# EAGLE board v2 (EAGLE 7.3.0)
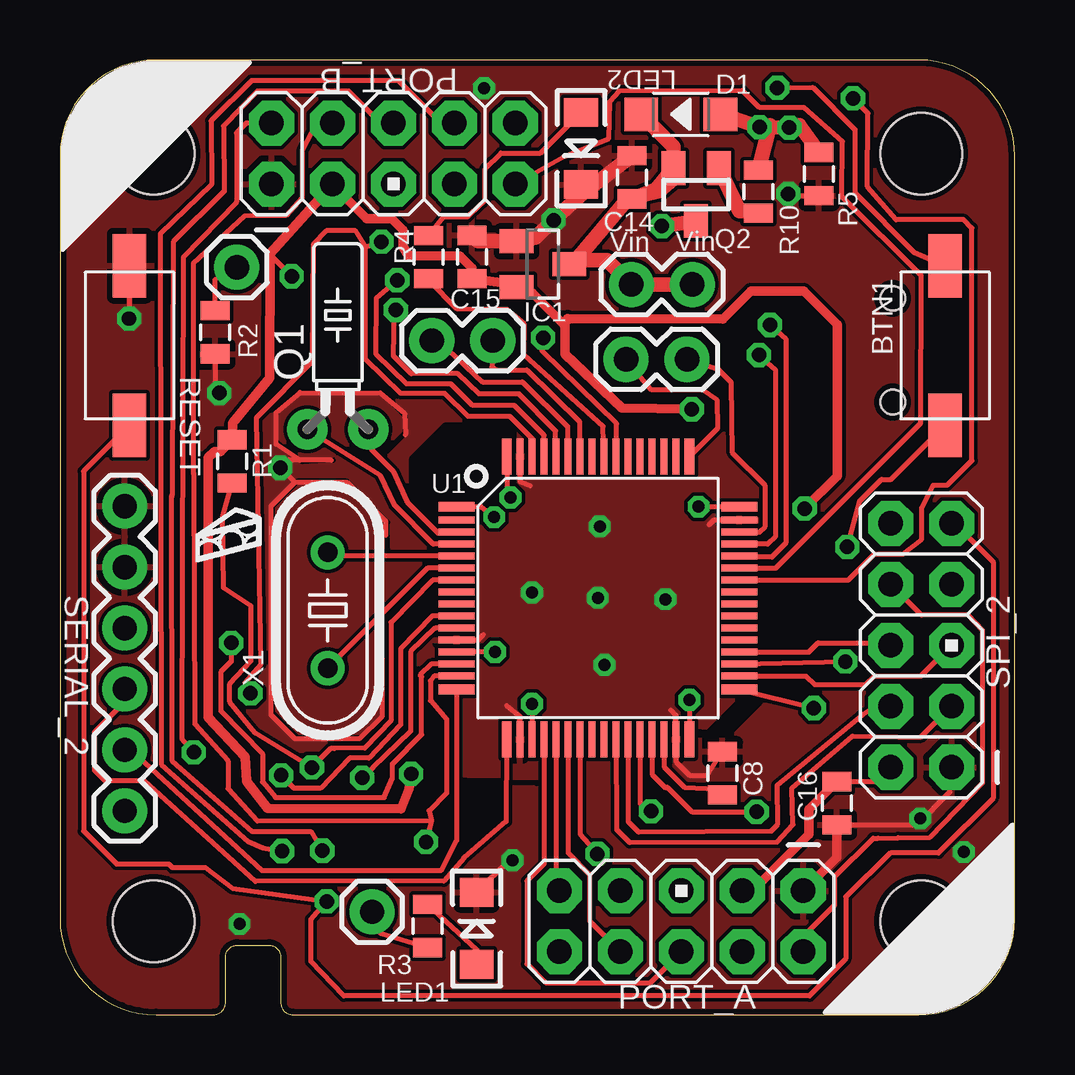
[diagram p0: board, top side]
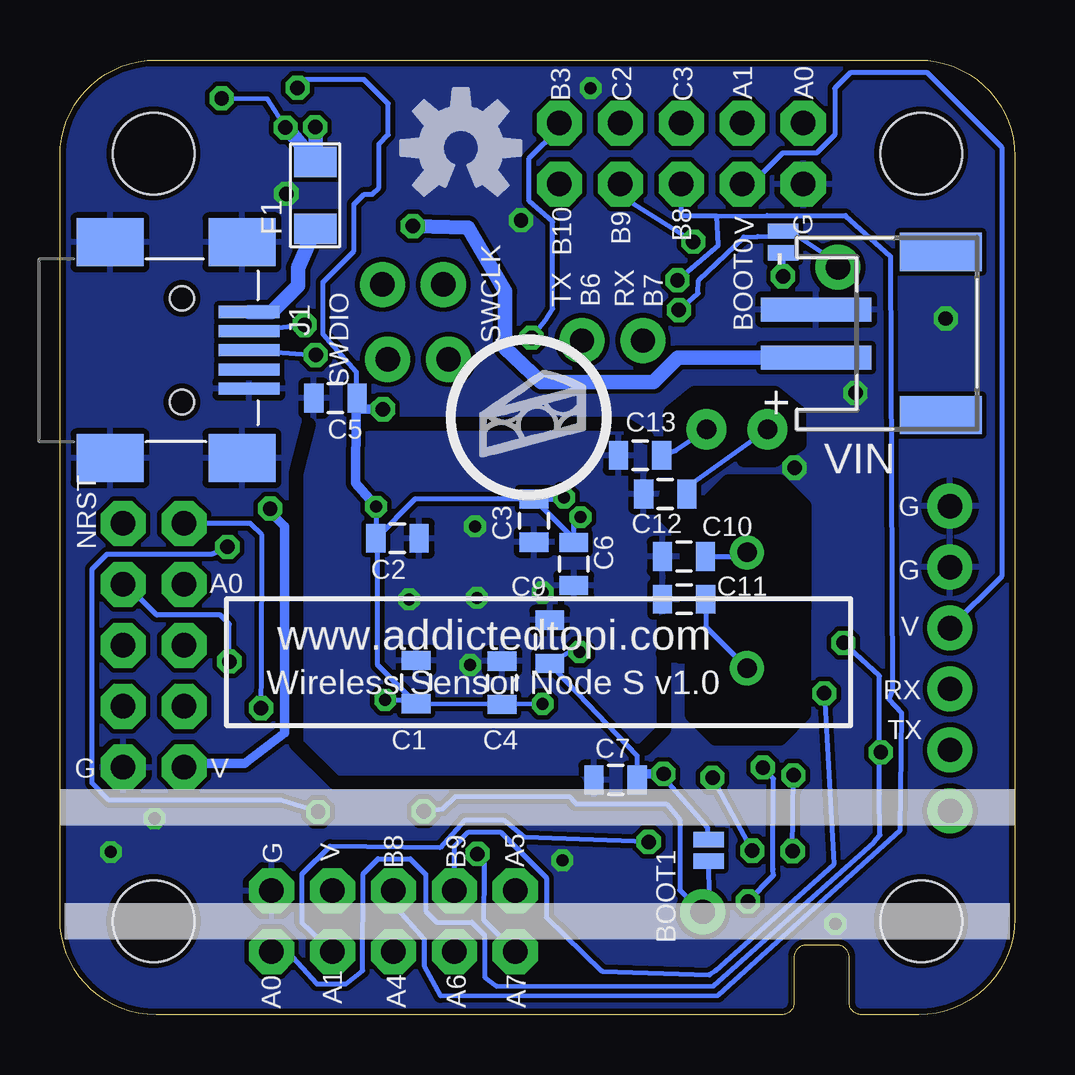
[diagram p1: board, bottom side, seen from below]

Size 39.8 x 39.8 mm. Coordinates in mm from the lower left corner, seen from the top.
Outline: 0,35.8 0,4 arc90 4,0 6.4,0 arc90 6.9,0.5 6.9,2.4 arc-90 7.4,2.9 8.7,2.9 arc-90 9.2,2.4 9.2,0.5 arc90 9.7,0 35.8,0 arc90 39.8,4 39.8,35.8 arc90 35.8,39.8 4,39.8 arc90 0,35.8
Copper layers (1*16): Top 0.035mm / dielectric 1.5mm / Bottom 0.035mm
Design rules "DFRobot_Eagle_Rule_v0.4": minimum track width 6mil, minimum drill 12mil, track to track 6mil, track to pad 6mil, pad to pad 6mil, via to via 6mil, smd to smd 0mil, copper to edge 10mil, drill to drill 10mil, minimum pad ring 12mil, minimum via ring 8mil, stop-mask expansion 2mil, vias tented up to drill 25mil, thermal gap 10mil
Holes 3.4 mm at 3.9,3.9 35.9,3.9 35.9,35.9 3.9,35.9
tRestrict: 29 lines
bRestrict: 32 lines

## Footprints (pad centres in the part's own frame; a part is rotated, then mirrored left to right if it is on the bottom)
SW2-4.0-6.0X3.0X2.5MM = smd 2.65 x 1.4: 1 -3.325,0; 2 3.325,0
0805 = smd 0.8 x 1.2: 1 -0.9,0; 2 0.9,0
SOD-123 = smd 1.397 x 1.397: + -1.651,0; - 1.651,0
F1206 = smd 1.27 x 1.778: 1 -1.397,0; 2 1.397,0
SOT23 = smd 1 x 1.4: 1 -0.95,-1.1; 2 0.95,-1.1; 3 0,1.1
MINIUSB5+4P-SMD-0.8-90D = smd 2.54 x 0.508: 1 0.381,-1.6; 2 0.381,-0.8; 3 0.381,0; 4 0.381,0.8; 5 0.381,1.6 | smd 2.794 x 2: P$1 6.175,4.5; P$2 6.175,-4.5; P$3 0.675,4.5; P$4 0.675,-4.5 | hole 1.016: 3.175,-2.159; 3.175,2.159
1X02 = drill 1.016 pad 1.88: 1 0,0; 2 2.54,0
1X01 = drill 1.016 pad 1.88: 1 0,0
LED-1206 = smd 1.2 x 1.4: A -1.5,0; C 1.5,0
AVR_ICSP = drill 1.016 pad 1.88 octagon: 1 -1.27,5.08; 2 1.27,5.08; 3 -1.27,2.54; 4 1.27,2.54; 5 -1.27,0; 6 1.27,0; 7 -1.27,-2.54; 8 1.27,-2.54; 9 -1.27,-5.08; 10 1.27,-5.08
TC26H = drill 0.813 pad 1.676: 1 -1.27,0; 2 1.27,0
SUPER-SOT3 = smd 1 x 1.4: 1 -0.95,-1.1; 2 0.95,-1.1; 3 0,1.1
1X06 = drill 1.016 pad 1.88: 1 0,0; 2 2.54,0; 3 5.08,0; 4 7.62,0; 5 10.16,0; 6 12.7,0
PAD-JUMPER-2-NO_NO_SILK = smd 0.635 x 1.27: 1 -0.45,0; 2 0.45,0
LQFP64-0.5-10X10MM = smd 1.5 x 0.4: 1 -5.9,3.81; 16 -5.9,-3.81; 33 5.9,-3.81; 48 5.9,3.81 | smd 1.5 x 0.28: 2 -5.9,3.25; 3 -5.9,2.75; 4 -5.9,2.25; 5 -5.9,1.75; 6 -5.9,1.25; 7 -5.9,0.75; 8 -5.9,0.25; 9 -5.9,-0.25; 10 -5.9,-0.75; 11 -5.9,-1.25; 12 -5.9,-1.75; 13 -5.9,-2.25; 14 -5.9,-2.75; 15 -5.9,-3.25; 34 5.9,-3.25; 35 5.9,-2.75; 36 5.9,-2.25; 37 5.9,-1.75; 38 5.9,-1.25; 39 5.9,-0.75; 40 5.9,-0.25; 41 5.9,0.25; 42 5.9,0.75; 43 5.9,1.25; 44 5.9,1.75; 45 5.9,2.25; 46 5.9,2.75; 47 5.9,3.25 | smd 0.4 x 1.5: 17 -3.81,-5.9; 32 3.81,-5.9; 49 3.81,5.9; 64 -3.81,5.9 | smd 0.28 x 1.5: 18 -3.25,-5.9; 19 -2.75,-5.9; 20 -2.25,-5.9; 21 -1.75,-5.9; 22 -1.25,-5.9; 23 -0.75,-5.9; 24 -0.25,-5.9; 25 0.25,-5.9; 26 0.75,-5.9; 27 1.25,-5.9; 28 1.75,-5.9; 29 2.25,-5.9; 30 2.75,-5.9; 31 3.25,-5.9; 50 3.25,5.9; 51 2.75,5.9; 52 2.25,5.9; 53 1.75,5.9; 54 1.25,5.9; 55 0.75,5.9; 56 0.25,5.9; 57 -0.25,5.9; 58 -0.75,5.9; 59 -1.25,5.9; 60 -1.75,5.9; 61 -2.25,5.9; 62 -2.75,5.9; 63 -3.25,5.9
JST-PH-2-SMT-RA = smd 1 x 4.6: 1 1,-3.7; 2 -1,-3.7 | smd 1.6 x 3.4: NC1 -3.4,1.5; NC2 3.4,1.5
HC49US = drill 0.813: 1 -2.413,0; 2 2.413,0

## Placement (x,y rotation side)
BTN1  [SW2-4.0-6.0X3.0X2.5MM]  36.9,27.9 90 top
C1  [0805]  24.96,13.87 90 bottom
C2  [0805]  25.73,19.86 180 bottom
C3  [0805]  20.04,20.6 270 bottom
C4  [0805]  21.37,13.84 90 bottom
C5  [0805]  28.32,25.7 180 bottom
C6  [0805]  18.38,18.79 90 bottom
C7  [0805]  16.64,9.79 0 bottom
C8  [0805]  27.62,10.07 90 top
C9  [0805]  19.38,15.55 90 bottom
C10  [0805]  13.79,19.1 0 bottom
C11  [0805]  13.78,17.32 0 bottom
C12  [0805]  14.57,21.71 0 bottom
C13  [0805]  15.62,23.32 0 bottom
C14  [0805]  23.84,34.91 270 top
C15  [0805]  17.18,31.59 270 top
C16  [0805]  32.38,8.82 90 top
D1  40V-500MA  [SOD-123]  25.88,37.53 180 top
F1  500MA  [F1206]  29.16,34.16 270 bottom
IC1  MCP1703CB  [SOT23]  20.13,31.29 270 top
J1  [MINIUSB5+4P-SMD-0.8-90D]  31.54,27.7 180 bottom
JP1  [1X02]  15.5,28.1 0 top
JP2  [1X02]  23.6,27.32 0 top
JP3  [1X01]  13.01,4.29 0 top
JP6  [1X01]  7.37,31.16 0 top
JP10  [1X02]  23.82,30.44 0 top
LED1  [LED-1206]  17.37,3.6 90 top
LED2  [LED-1206]  21.72,36.11 270 top
PORT_A  [AVR_ICSP]  25.9,3.9 270 top
PORT_B  [AVR_ICSP]  13.9,35.9 90 top
Q1  [TC26H]  11.58,24.4 0 top
Q2  FDN360P  [SUPER-SOT3]  26.52,34.19 180 top
R1  [0805]  7.18,23.07 270 top
R2  [0805]  6.47,28.45 270 top
R3  [0805]  15.32,3.7 270 top
R4  [0805]  15.37,31.58 270 top
R5  [0805]  31.64,35.05 270 top
R10  [0805]  29.12,34.31 270 top
RESET  [SW2-4.0-6.0X3.0X2.5MM]  2.9,27.9 90 top
SERIAL_2  [1X06]  2.7,21.2 270 top
SJ1  JUMPER-PAD-2-NO  [PAD-JUMPER-2-NO_NO_SILK]  9.66,32.21 270 bottom
SJ2  JUMPER-PAD-2-NO  [PAD-JUMPER-2-NO_NO_SILK]  12.76,6.85 270 bottom
SPI_2  [AVR_ICSP]  35.9,15.4 180 top
U1  [LQFP64-0.5-10X10MM]  22.43,17.37 0 top
U$1  [PI]  17.09,21.94 0 top
U$2  [OSHW-LOGO-M]  23.09,36.13 0 bottom
U$3  [PI_XS]  8.91,18.05 0 bottom
VIN  [JST-PH-2-SMT-RA]  4.58,28.4 270 bottom
X1  [HC49US]  11.16,16.86 90 top

## Library data of the parts
BTN1 RESET = Seeed-OPL-Switch
C1-C16 R1-R5 R10 SJ1 SJ2 = SparkFun-Passives
D1 = Seeed-OPL-Diode; MPN: B0540W
F1 = Seeed-OPL-fuse
IC1 = linear
J1 = Seeed-OPL-Connector; MPN: ST-USB-002A
JP1-JP3 JP6 JP10 PORT_A PORT_B SPI_2 = SparkFun-Connectors
LED1 LED2 = SparkFun-LED
Q1 = adafruit; OC_FARNELL: unknown; OC_NEWARK: unknown
Q2 = transistor-power
SERIAL_2 = SparkFun-Connectors; PROD_ID: CONN-08437
U1 = Seeed-OPL-ic; MPN: STM32F401RBT6
U$1 U$3 = mystuff
U$2 = SparkFun-Aesthetics
VIN = adafruit
X1 = Seeed-OPL-crystal-osctllator

## Nets
5V: C14.2 D1.- IC1.3 JP10.1 JP10.2 Q2.2
A1: PORT_A.4 PORT_B.4 U1.15
A2: SERIAL_2.5 U1.16
A3: SERIAL_2.4 U1.17
A4: PORT_A.6 U1.20
A5: PORT_A.9 U1.21
A6: PORT_A.8 U1.22
A7: PORT_A.10 U1.23
A8: U1.41
A10: PORT_B.9 U1.43
A15: U1.50
B0: SPI_2.3 U1.26
B1: SPI_2.4 U1.27
B2: JP3.1 R3.2 SJ2.2 U1.28
B3: PORT_B.10 U1.55
B4: R4.2 U1.56
B5: U1.57
B6: JP1.2 U1.58
B7: JP1.1 U1.59
B8: PORT_A.5 PORT_B.5 U1.61
B9: PORT_A.7 PORT_B.7 U1.62
B10: BTN1.1 U1.29
B12: SPI_2.10 U1.33
B13: SPI_2.5 U1.34
B14: SPI_2.7 U1.35
B15: SPI_2.6 U1.36
BOOT0: JP6.1 R2.1 SJ1.1 U1.60
C0: U1.8
C1: U1.9
C2: PORT_B.8 U1.10
C3: PORT_B.6 U1.11
C4: U1.24
C5: U1.25
C6: U1.37
C7: U1.38
C8: U1.39
C9: U1.40
C10: U1.51
C11: U1.52
C12: U1.53
C13: U1.2
D2: U1.54
GND: C1.2 C2.1 C3.2 C4.2 C5.2 C6.1 C7.1 C8.2 C9.2 C10.1 C11.1 C12.1 C13.1 C14.1 C15.1 C16.1 IC1.1 J1.5 J1.P$1 J1.P$2 J1.P$3 J1.P$4 LED1.C LED2.C PORT_A.1 PORT_B.1 R2.2 R5.2 RESET.2 SERIAL_2.1 SERIAL_2.2 SPI_2.1 U1.12 U1.18 U1.31 U1.47 U1.63 VIN.2
INT: PORT_A.2 PORT_B.2 SPI_2.8 U1.14
N$1: C13.2 Q1.2 U1.3
N$2: C8.1 U1.30
N$3: C12.2 Q1.1 U1.4
N$4: C10.2 U1.5 X1.2
N$5: C11.2 U1.6 X1.1
N$6: J1.2 U1.44
N$7: J1.3 U1.45
N$8: F1.2 J1.1
N$10: LED1.A R3.1
N$11: LED2.A R4.1
N$14: Q2.1 R10.2
NRST: R1.2 RESET.1 SPI_2.9 U1.7
SWCLK: JP2.1 U1.49
SWDIO: JP2.2 U1.46
VDD: BTN1.2 C1.1 C2.2 C3.1 C4.1 C5.1 C6.2 C7.2 C9.1 C15.2 C16.2 IC1.2 PORT_A.3 PORT_B.3 R1.1 SERIAL_2.3 SJ1.2 SJ2.1 SPI_2.2 U1.1 U1.13 U1.19 U1.32 U1.48 U1.64
VIN: Q2.3 VIN.1
VUSB: D1.+ F1.1 R5.1 R10.1 U1.42

## Tracks (layer width: path | path; a pad name or v marks a point on that pad's centre or on a via)
5V
  Top 0.6: 24.12,37.42 D1.- 25.57,36.19 Q2.2 | C14.2 24.86,34.41 Q2.2 | Q2.2 25.7,34.96 24.96,34.34 23.68,34.02 21.52,31.46 | 21.52,31.46 IC1.3 | 21.52,31.46 22.8,31.46 JP10.1 JP10.2
A1  (via drill 0.6)
  Top 0.2: U1.15 15.6,14.12 15.44,13.92 15.44,13.1 16.12,12.32 16.12,9.24 15.38,8.5 15.49,8.1 | 15.49,8.1 v15.26,7.2 | PORT_B.4 10.69,37.17 10.1,36.02 10.1,34.06 9.42,33.32 7.7,33.3 5.56,31.32 5.56,22.56 5.58,22.54 5.62,12.12 7,10.58 7,9.42 8.22,8.08 15.49,8.1
  Bottom 0.2: v15.26,7.2 20.44,7.4 21.28,8.1 22.94,8.1 23.96,6.96 28.54,7.02 29.72,5.86 29.72,3.85 PORT_A.4
A2
  Top 0.2: U1.16 16.54,7.26 15.88,6 8.42,6 3.02,10.98 SERIAL_2.5
A3
  Top 0.2: U1.17 18.6,8.06 16.84,6.54 16.01,5.58 8.14,5.56 3.5,9.74 1.88,9.74 1.44,10.18 1.44,11.78 2.7,13.04 SERIAL_2.4
A4
  Top 0.2: U1.20 20.18,6.3 19.46,5.58 19.46,2.12 20.24,1.34 24.61,1.34 PORT_A.6
A5
  Top 0.2: U1.21 20.68,5.31 PORT_A.9
A6
  Top 0.2: U1.22 21.18,6.74 22.08,5.84 22.08,3.91 PORT_A.8
A7  (via drill 0.6)
  Top 0.2: U1.23 21.68,7.52 v22.4,6.7
  Bottom 0.2: v22.4,6.7 22.12,6.42 22.12,5.96 22.14,3.95 PORT_A.10
A10
  Top 0.2: U1.43 29.84,18.62 35.88,24.66 35.9,30.82 32.6,34.1 32.62,36.4 31,37.82 29.16,37.82 28.44,38.52 23.3,38.5 22.9,38.06 22.86,36.5 21.03,35.77 PORT_B.9
B0
  Top 0.2: U1.26 23.2,7.72 23.74,7.18 29.9,7.2 30.56,7.92 30.52,9.46 33.04,11.62 35.86,11.57 SPI_2.3
B1
  Top 0.2: U1.27 23.68,8.06 24.12,7.62 29.66,7.66 29.92,7.94 29.9,9.58 33.46,12.52 33.94,12.83 SPI_2.4
B2  (via drill 0.6)
  Top 0.2: U1.28 24.18,8.8 v24.64,8.48 | R3.2 13.38,3.38 JP3.1
  Bottom 0.2: v24.64,8.48 23.86,8.58 23.32,9.1 18.58,9.1 18.28,8.78 14.52,8.78 13.96,8.12 13.96,5.2 JP3.1 12.74,4.86 SJ2.2
B3  (via drill 0.6)
  Top 0.2: U1.55 23.2,24.64 20.1,27.66 20.1,28.24 v20.14,28.22
  Bottom 0.2: v20.14,28.22 19.56,28.96 19.26,29.42 19.26,33.06 20.24,33.92 20.24,35.7 18.98,36.96 PORT_B.10
B4
  Top 0.2: U1.56 22.64,24.52 19.34,27.5 19.36,28.73 19.36,28.78 18.64,29.4 16.56,29.42 15.4,30.58 R4.2
B6
  Top 0.2: JP1.2 18.01,27.01 18.2,26.88 19.46,26.88 21.66,24.72 21.66,23.29 U1.58
B7
  Top 0.2: JP1.1 15.8,28.08 17.62,26.38 19.28,26.38 21.16,24.52 U1.59 21.18,23.25
B8  (via drill 0.6)
  Top 0.2: U1.61 20.18,24.16 18.94,25.4 17.2,25.4 16.3,26.3 14.44,26.3 13.18,27.52 13.2,29.9 v14.06,30.62
  Bottom 0.2: PORT_A.5 25.9,4.58 24.62,3.14 24.62,2.04 23.94,0.8 12.36,0.82 4.8,7.66 4.72,12.58 5.24,13.14 5.1,13.54 5.18,31.62 7.06,33.32 10.32,33.32 12.42,33.28 | v14.06,30.62 12.36,32.08 12.42,33.28 | 12.42,33.28 13.9,33.28 PORT_B.5
B9  (via drill 0.6)
  Top 0.2: U1.62 19.68,24.02 18.76,24.94 17,24.94 16.04,25.9 14.2,25.9 12.74,27.32 12.74,32.02 | 12.74,32.02 13.38,32.18 | 12.74,32.02 12.32,32.68 11.1,32.68 10.56,32.12 10.52,27.22 8.18,24.88 8.36,14.6 7.7,13.84 v7.94,13.4 | 13.38,32.18 13.36,32.14 | 13.38,32.18 v13.4,32.22
  Bottom 0.2: v7.94,13.4 7.54,6.26 12.48,1.84 12.68,1.7 12.72,1.66 17.2,1.82 19.52,4.06 19.52,5.7 21.44,7.62 22.76,7.62 23.36,7.02 PORT_A.7 | v13.4,32.22 16.09,33.91 16.44,34.26 PORT_B.7
B10  (via drill 0.6)
  Top 0.2: U1.29 24.68,10.02 25.24,9.46 25.32,9.48 26.34,8.46 v29.04,8.46 | v32.82,19.5 33.34,21.42 34.24,22.32 34.64,22.32 BTN1.1
  Bottom 0.2: v29.04,8.46 30.58,8.94 37.74,8.94 38.46,9.66 38.46,18.58 37.84,19.2 33.48,19.2 v32.82,19.5
B12  (via drill 0.6)
  Top 0.2: U1.33 v31.42,12.78
  Bottom 0.2: v31.42,12.78 31.4,14.4 31.38,19.99 31.87,20.48 SPI_2.10
B13
  Top 0.2: U1.34 31.1,14.12 31.46,13.76 33.58,13.76 33.94,14.12 35.89,14.12 SPI_2.5
B14  (via drill 0.6)
  Top 0.2: U1.35 v32.74,14.72
  Bottom 0.2: v32.74,14.72 32.74,16.28 33.12,16.66 35.76,16.66 37.04,17.94 SPI_2.7
B15
  Top 0.2: U1.36 31.22,15.12 31.6,15.5 34.19,15.5 SPI_2.6
BOOT0  (via drill 0.6)
  Top 0.2: U1.60 20.66,24.34 19.14,25.88 17.46,25.88 16.58,26.72 14.64,26.72 13.9,27.46 13.94,29.42 14.16,29.58 v14,29.38 | R2.1 6.47,30.66 JP6.1
  Bottom 0.2: v14,29.38 13.2,30.08 13.18,30.62 11.3,32.42 10.72,32.44 9.12,32.5 | JP6.1 8,31.74 9.12,32.5 | 9.12,32.5 9.42,32.6 SJ1.1
C2  (via drill 0.6)
  Top 0.2: U1.10 15.5,16.62 14.2,15.26 14.2,12.1 12.88,10.7 12.08,10.7 10.86,9.44 9.76,9.44 v9.22,9.98 | PORT_B.8 15.89,37.17 14.12,38.94 7.98,38.94 6.3,37.26 6.32,34.6 4.18,32.54 4.22,10.44 7.84,7.22 8.46,6.96 v9.26,6.82
  Bottom 0.2: v9.26,6.82 v9.22,9.98
C3  (via drill 0.6)
  Top 0.2: U1.11 15.64,16.12 14.62,15.14 14.62,11.82 13.04,10.28 v12.6,9.88 | PORT_B.6 13.37,37.17 12.04,38.5 8.22,38.5 6.82,37.06 6.84,34.3 6.8,34.3 4.72,32.22 4.68,21.76 4.68,21.68 4.66,21.6 4.68,10.58 8.02,7.64 10.46,7.64 v10.94,6.84
  Bottom 0.2: v10.94,6.84 v12.6,9.88
GND  (via drill 0.5 pad 0.25, 0.6)
  Top 0.2: U1.63 19.18,22.22 19.6,22.06 | U1.47 27.26,20.62 27.06,20.42 | 25.46,12.7 25.68,12.48 U1.31 25.68,10.54 26.24,9.98 26.97,9.98 C8.2 | U1.18 19.18,12.42 18.62,12.88 | U1.12 17.42,15.62 17.64,15.84 | 11.32,23.12 10,23.12 | 10,23.12 9,23.78 9,25.1 10,25.94 13.36,25.92 14.36,25.08 14.4,24.18 | 13.42,14.88 13.42,12.42 12.48,11.5 9.8,11.5 8.8,12.5 8.8,21.2 9.8,22.2 | 9.8,22.2 11.96,22.2 13.58,20.58 13.58,19.98 | 10,23.12 9.5,23.12 v9.18,22.8 9.78,22.2 9.8,22.2 | C16.1 35.74,7.92 37.1,9.28 37.1,10.25 SPI_2.1 | v18.86,6.44 18.71,6.44 LED1.C | R5.2 31.22,34.08 v30.36,34.22 | v20.58,33.12 21.6,34.3 LED2.C | RESET.2 2.88,31.2 v2.88,29.02 | R2.2 6.47,26.09 v6.64,25.92
  Top 0.4: C16.1 32.38,6.57 PORT_A.1
  Top 0.6: C15.1 17.43,32.24 IC1.1 19.82,32.4 v20.58,33.12 21.67,34.15 C14.1
  other vias: 22.5,20.36 25.24,17.32 22.42,17.38 19.68,17.6 22.7,14.58 7.48,3.78 35.86,8.18 17.68,38.62 37.68,6.78
  pour Top (isolate 0.2): 17.5,22.3 27.4,22.3 27.4,12.28 17.44,12.28 17.44,22.22
  pour Bottom (isolate 0.2): 29.4,11.28 29.56,22.2 27.56,24.22 17.06,24.22 15.06,22.22 15.06,12.02 17.06,10.02 28.16,10.02
  pour Bottom (isolate 0.2): 0.1,6.7 -0.03,35.69 arc-90 3.97,39.7 35.66,39.7 arc-90 39.66,35.7 39.66,4.12 arc-90 35.66,0.12 4.08,0.12 arc-91 0.08,4.16
  pour Top: 0.14,0.14 39.56,0.14 39.56,39.54 0.16,39.54 0.16,35.12
INT  (via drill 0.6)
  Top 0.2: PORT_A.2 30.98,3.26 32.3,4.58 32.3,5.76 33.9,7.36 34.1,7.36 34.94,7.38 36.28,7.4 38.46,9.66 38.46,16.02 37.86,16.66 35.91,16.66 SPI_2.8 | PORT_B.2 7.77,37.17 7.36,36.76 7.36,33.88 5.14,31.58 5.08,11.52 v5.58,10.94 | U1.14 15.48,14.62 15.02,14.16 15.08,14.1 15.08,11.68 13.86,10.46 13.86,9.88 13.52,9.06 8.98,9.06 8.44,9.7 8.44,10.88 6.7,12.66 6.7,14.28 7.14,14.72 v7.14,15.5
  Bottom 0.2: 5.64,10.94 5.64,9.22 5.62,7.48 5.88,7.18 12.56,1.2 21.6,1.19 22.1,1.57 22.1,3.32 22.64,3.86 24.1,3.86 24.56,4.32 24.56,5.86 25.2,6.5 26.54,6.5 27.16,5.88 27.18,1.84 27.88,1.28 29.1,1.28 30.31,2.63 PORT_A.2 | 5.64,10.94 v5.58,10.94 | 5.64,10.94 5.64,14.12 v7.14,15.5
N$1
  Top 0.2: Q1.2 13.01,23.53 13.88,22.66 14.46,21.38 15.76,20.08 16.49,20.08 U1.3
  Bottom 0.2: C13.2 14.14,23.51 Q1.2
N$2
  Top 0.2: U1.30 25.18,10.34 26.04,9.48 27.41,9.42 C8.1
N$3
  Top 0.2: U1.4 15.56,19.62 13.94,21.24 13.36,22.47 Q1.1
  Bottom 0.2: C12.2 13.67,22 Q1.1
N$4
  Top 0.2: U1.5 11.31,19.12 X1.2
  Bottom 0.2: C10.2 11.33,19.1 X1.2
N$5
  Top 0.2: U1.6 15.33,18.62 X1.1
  Bottom 0.2: C11.2 12.88,16.17 X1.1
N$6  (via drill 0.6)
  Top 0.2: v29.6,28.76 30.26,28.18 30.26,19.66 29.68,19.08 28.37,19.08 U1.44
  Bottom 0.2: J1.2 v29.6,28.76
N$7  (via drill 0.6)
  Top 0.2: v29.14,27.5 29.82,26.9 29.82,19.92 29.5,19.62 U1.45
  Bottom 0.2: J1.3 v29.14,27.5
N$8
  Bottom 0.6: F1.2 29.88,31.14 29.88,30.4 30.98,29.3 J1.1
N$10
  Top 0.2: R3.1 17.37,2.72 LED1.A
N$11
  Top 0.2: 21.7,37.59 LED2.A 20.03,35.92 18.38,35.92 17.72,35.26 17.72,33.96 17.11,33.39 16.98,33.26 16,33.26 R4.1
N$14
  Top 0.6: Q2.1 28.33,33.49 R10.2
NRST  (via drill 0.6)
  Top 0.2: U1.7 15.54,18.12 13.8,16.36 13.8,12.26 12.7,11.12 11.44,11.1 11.29,11.1 v10.5,10.31 8.14,11.74 7.08,13.04 7.08,13.78 7.96,14.74 7.96,17.04 6.82,17.8 6.78,20.7 6.81,20.82 R1.2 | SPI_2.9 37.3,20.48 38.9,18.88 38.9,9.02 36.62,6.74 34.62,6.74 32.76,4.92 32.76,2.34 31.24,0.78 11.84,0.78 10.46,2.22 10.46,3.98 v11.12,4.72 7.2,5.26 6.06,6.14 4.68,6.14 4.54,6.28 2.36,6.28 0.98,7.66 0.98,22.65 RESET.1
  Bottom 0.2: v11.12,4.72 10.06,5.82 10.08,6.08 10.06,9.85 v10.5,10.31
SWCLK
  Top 0.2: U1.49 27.42,24.45 27.4,25.62 26.8,26.04 24.66,26.04 JP2.1
SWDIO
  Top 0.2: U1.46 29.16,20.12 29.4,20.36 29.4,22.06 28.04,23.42 27.98,26.36 27.44,26.9 JP2.2
VDD  (via drill 0.5 pad 0.25, 0.6)
  Top 0.2: v19.68,12.96 U1.19 | v26.24,13.12 U1.32 | v18.14,15.12 U1.13 | U1.1 17.56,21.18 v18.1,20.74 | U1.64 18.64,21.8 v18.78,21.56 | v26.62,21.18 U1.48 | C16.2 34.03,9.72 SPI_2.2 | v29.9,38.64 31.38,38.66 33.14,36.9 33.14,34.26 35.6,31.8 BTN1.2 | 8.76,31.73 8.76,31.68 v9.66,30.78
  Top 0.4: 20.99,28.79 19.69,30.09 IC1.2 18.53,30.5 C15.2 17.18,31.12 16.68,31.62 14.54,31.64 14.3,32.02 14.3,32.7 13.82,33.18 12.78,33.18 11.36,34.6 PORT_B.3 8.76,31.73 8.74,26.54 7.2,24.66 R1.1 6.69,23.48 6.44,23.48 6.18,23.22 6.18,12.4 7.72,10.74 7.78,9.72 8.66,8.6 14.22,8.58 14.56,9.42 v14.64,10.04 | 20.99,28.79 21.06,28.72 21.06,27.54 23.42,25.28 v26.34,25.24 | PORT_A.3 28.87,5.17 31.22,7.52 31.22,8.56 C16.2 | v31.04,21.1 32.4,22.46 32.4,28.76 31,30.16 28.8,30.16 27.64,29 21.16,29.02 21.16,28.96 20.99,28.79
  Bottom 0.2: v18.14,15.12 18.57,15.12 C9.1 19.03,14.27 15.73,10.79 C7.2 | v19.68,12.96 C4.1 C1.1 25.11,13.12 | v26.24,13.12 25.11,13.12 | v26.62,21.18 C2.2 | v18.1,20.74 18.38,20.46 C6.2 18.38,19.84 C3.1 | C3.1 18.84,21.5 v18.78,21.56 | 25.11,13.12 25.11,13.13 26.56,14.58 26.56,19.79 C2.2 | C3.1 24.99,21.5 C2.2 | SJ2.1 12.8,7.79 14.56,9.81 v14.64,10.04 | SERIAL_2.3 0.52,18.3 0.52,36.14 3.64,39.26 6.86,39.26 7.5,38.62 7.5,36.68 8.26,35.92 9.68,35.92 10.97,34.63 PORT_B.3 | 27.4,25.24 27.46,25.18 C5.1 27.44,26.8 28.84,28.38 28.84,30.54 27.54,31.84 27.54,33.78 27.12,34.2 26.78,34.2 26.5,34.48 26.5,36.3 26.12,36.68 26.12,37.98 27.12,38.98 29.56,38.98 v29.9,38.64 | SJ1.2 v9.66,30.78
  Bottom 0.4: v26.62,21.18 27.48,22.16 27.46,25.18 | 27.4,25.24 v26.34,25.24 | C7.2 15.49,10.04 v14.64,10.04 | v31.04,21.1 31.04,20.96 30.44,20.36 30.44,11.74 32.1,10.48 34.47,10.48 SPI_2.2
VIN  (via drill 0.6)
  Top 0.6: v25.09,32.88 Q2.3
  Bottom 0.6: VIN.1 14.04,27.4 15.06,26.38 19.74,26.38 21.24,27.8 21.24,30.16 22.8,32.82 v25.09,32.88
VUSB  (via drill 0.6)
  Top 0.2: U1.42 32.86,18.12 33.94,19.2 35.14,19.2 35.92,19.82 35.92,21.14 36.4,22.08 36.98,22.08 38.02,23.1 38.02,32.8 37.68,33.14 34.86,33.14 33.66,34.52 33.68,37.58 v33.06,38.2 | 27.56,37.56 D1.+
  Top 0.6: v29.16,37 27.56,37.56 | v29.16,37 v30.4,36.98 30.83,37.08 R5.1 | R10.1 29.6,37.08 v29.16,37
  Bottom 0.2: v33.06,38.2 31.16,38.18 v30.4,36.98
  Bottom 0.6: v29.16,37 29.12,35.74 F1.1 30.34,36.96 30.32,36.92

## Text on the board
tNames: Vin | Vin
bNames: C3 | C2 | B3 | A0 | A1 | G | B8 | B9 | B10 | V | RX / B7 | TX / B6 | SWDIO | BOOT0 | SWCLK | G | NRST | G | A0 | V | www.addictedtopi.com | RX | Wireless Sensor Node S v1.0 | TX | V | G | BOOT1 | A5 | B9 | B8 | V | G | A7 | A6 | A4 | A1 | A0